# Altium PCB 110-00315-D_B1-DevKit.PcbDoc (part 7 of 9)
Units mil, origin at the board's own origin, x right, y up, seen from the top; angles counter-clockwise.
Board outline 5199.57 x 2702 mil, 8 copper layers (Top Layer, Layer 2-GND-Plane, Layer 3, Layer 4, Layer 5, Layer 6, Layer 7-PWR-Plane, Bottom Layer), stack 60.866 mil thick; 418 components, 298 nets, 1591 pads, 1631 vias.
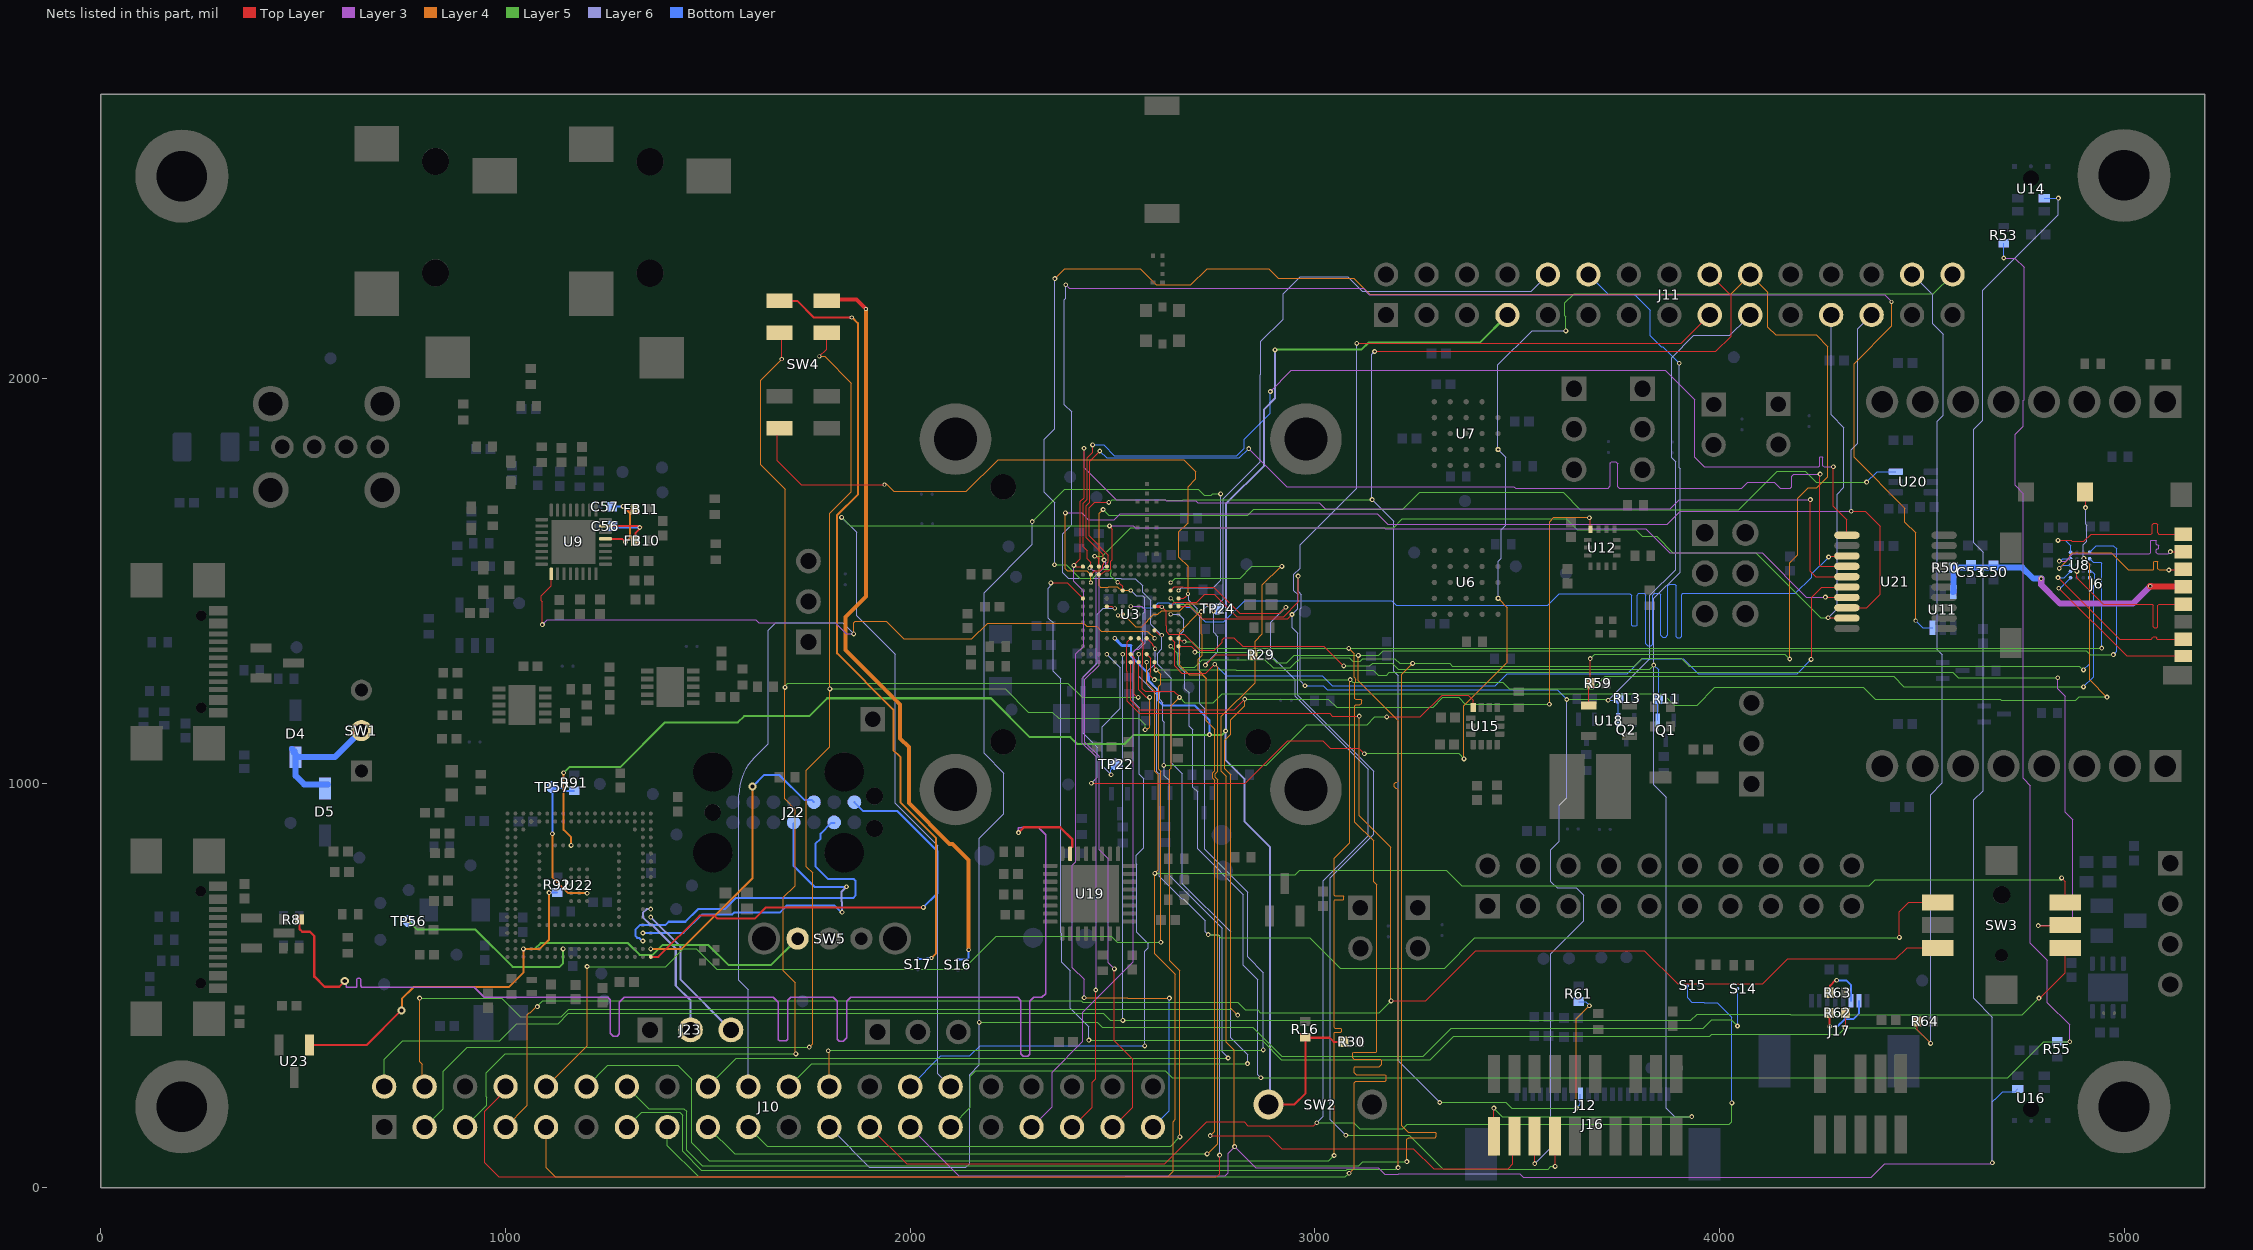
[diagram p12: the nets of this part, all layers, seen from the top]

## Via types
v1: diameter 20, hole 10, Top Layer to Bottom Layer, tented both sides, 773 vias
v2: diameter 12, hole 6, Top Layer to Bottom Layer, tented both sides, 549 vias
v3: diameter 12, hole 6, Top Layer to Bottom Layer, 194 vias
v4: diameter 10, hole 6, Top Layer to Bottom Layer, 101 vias
v5: diameter 10, hole 6, Top Layer to Bottom Layer, tented both sides, 10 vias
v6: diameter 15, hole 8, Top Layer to Bottom Layer, 4 vias

## Nets (pads, with @x,y where several pads share a name; then routed paths per layer and width w, separated by ;. In a path a pad name is that pad's centre, name@x,y a point inside that pad or via, vN(x,y) a via of type N, cw(c..) or ccw(c..) an arc to the next point about the centre after c; other vN are vias at no path point) (continued)
P4_4: J11.17 J12.14 U3.A6 | length 4005.2
  Top Layer w3: U3.A6@2663.06,1436.74 2690.59,1436.74 2721.53,1405.8 2932.53,1405.8 v2(2943.53,1416.8) ; v2(3103.58,2086.8) 3905.8,2086.8 3972.58,2153.58 J11.17@3972.58,2160.8 ; J12.14@3593,127.46 3593.58,126.88 v2@3593.58,53.8
  Layer 5 w3: v2(3076.58,129.8) 3233.58,129.8 3317.58,45.8 3576.58,45.8 3583.58,52.8 v2(3593.58,52.8)
  Layer 6 w3: v2(3076.58,129.8) 3038.53,167.84 3038.53,766.8 3145.53,873.8 3145.53,1028.8 2957.58,1216.75 2957.58,1370.3 2943.53,1384.35 v2(2943.53,1416.8) 2957.58,1430.84 2957.58,1466.31 2948.08,1475.81 2948.08,1516.15 2963.53,1531.6 2963.53,1588.75 3103.58,1728.8 v2(3103.58,2086.8)
P4_5: J11.19 J12.16 Q2.1 R13.2 U3.B6 | length 4057.4
  Top Layer w3: U3.B6@2643.37,1436.74 2653.12,1446.49 2692.23,1446.49 2692.53,1446.8 2707.58,1446.8 2727.58,1466.8 2751.58,1466.8 2806.58,1411.8 2922.53,1411.8 2958.58,1447.84 v2(2958.58,1511.8) ; J12.16@3543,127.46 3543.58,126.88 v2(3543.58,59.8) 3543.58,56.8 v2@3544.58,55.8
  Layer 5 w3: v2(3622.58,1206.8) 3722.58,1206.8 v2(3724.58,1204.8)
  Layer 6 w3: v2(2958.58,1511.8) 2958.58,1473.8 2966.58,1465.8 2966.58,1433.8 2963.58,1430.8 2963.58,1252.8 v2(2975.58,1240.8) ; v2(3543.58,59.8) 3582.58,98.8 3582.58,577.8 3664.58,659.8 3664.58,722.8 3645.58,741.8 3598.58,741.8 3583.58,756.8 3583.58,835.8 3603.58,855.8 3603.58,944.8 3622.58,963.8 v2(3622.58,1206.8) ; v2(3724.58,1204.8) 3725.25,1204.8 3827.53,1307.08 3827.53,1463.8 3891.53,1527.8 3891.53,1794.3 3881.53,1804.3 3881.53,2051.66 3936.67,2106.8 4025.8,2106.8 4066.8,2147.8 J11.19@4076.58,2147.8
  Bottom Layer w3: v2(2975.58,1240.8) 3020.58,1240.8 3030.58,1230.8 3598.58,1230.8 v2(3622.58,1206.8) ; v2(3724.58,1204.8) 3747.11,1204.8 R13.2@3750,1207.69 ; Q2.1@3750,1156 R13.2@3750,1207.69 ; R13.2@3752.32,1210 R13.2@3750,1207.69
P4_6: J11.10 J12.18 U3.B5 | length 4076.5
  Top Layer w3: v2(2741.58,128.8) 2885.58,128.8 2917.58,96.8 3243.58,96.8 3293.58,46.8 3477.58,46.8 3489.58,58.8 3489.58,99.8 J12.18@3497.58,107.8
  Layer 5 w3: v4(2643.37,1456.43) 2658,1441.8 2688.58,1441.8 2707.58,1422.8 2718.58,1422.8 v2(2719.58,1423.8)
  Layer 4 w3: v2@2719.53,1421.8 2719.25,1422.07 2715.42,1422.07 2715.14,1421.8 2714.53,1421.8 2665.53,1372.8 2665.53,1291.8 2689.53,1267.8 2721.58,1267.8 2731.58,1257.8 ; v2@2719.58,1421.8 2719.58,1369.58 2721.58,1367.58 2721.58,1315.8 2711.58,1305.8 2711.58,1279.8 2731.58,1259.8 2731.58,1257.8 ; v2(2741.58,128.8) 2752.58,139.8 2752.58,1007.46 2748.08,1011.96 2748.08,1025.63 2752.58,1030.13 2752.58,1132.8 2731.58,1153.8 2731.58,1251.8 2731.58,1257.8
  Layer 6 w3: v2(2719.58,1423.8) 2732.98,1437.2 2755.98,1437.2 2773,1454.22 2773,1702.22 2865.58,1794.8 2865.58,2008.8 ; 2866.58,2008.8 2866.58,2091.8 2921.53,2146.75 2921.53,2209.8 2963.53,2251.8 3081.53,2251.8 3117.53,2215.8 3534.8,2215.8 3574.53,2255.53 J11.10@3574.53,2257.8 ; J11.10@3574.87,2258.14 J11.10@3575.58,2257.43
P4_7: J11.12 J12.20 Q1.1 R11.2 U3.D6 | length 4394.3
  Top Layer w3: v4@2622.53,1436.8 2622.53,1434.84 2633.08,1424.3 2633.08,1388.8 ; 2633.53,1388.8 2633.53,1373.74 2639.34,1367.94 2639.53,1367.75 2676.62,1367.75 2715.58,1328.8 2751.58,1328.8 2770.58,1347.8 2770.58,1353.8 2776.58,1359.8 2799.53,1359.8 2821.53,1337.8 3022.58,1337.8 v2@3071.58,1288.8 ; v2@3442.58,194.8 3442.58,127.88 J12.20@3443,127.46
  Top Layer w8: U3.D6@2604,1436.74 v4@2620.63,1436.74
  Layer 5 w3: v2(3071.58,1289.8) 3135.58,1289.8 3142.58,1296.8 3165.58,1296.8 3166.58,1295.8 3191.58,1295.8 3205.58,1281.8 3827.58,1281.8 v2(3837.58,1291.8) ; v2(3442.58,196.8) 3463.58,175.8 v2(3931.58,175.8)
  Layer 4 w3: J11.12@3664.58,2255.8 J11.12@3677.21,2255.8
  Layer 6 w3: v2(3900.53,2037.8) 3900.53,1779.6 3902.58,1777.56 3902.58,1521.8 3837.58,1456.8 v2(3837.58,1291.8) 3837.58,996.08 3868.58,965.08 3868.58,196.8 3889.58,175.8 v2(3931.58,175.8)
  Bottom Layer w3: J11.12@3670.53,2254.8 3678.21,2254.8 3725.21,2207.8 3789.53,2207.8 3828.53,2168.8 3828.53,2105.8 3856.24,2078.08 3860.24,2078.08 v2(3900.53,2037.8) ; v2@3837.58,1292.8 v2(3837.58,1291.8) 3849.32,1280.06 R11.2@3849.32,1208 ; R11.2@3845.58,1205.8 3847.32,1204.06 Q1.1@3847.32,1155.58
  other v4: 2621.58,1435.8
P5_0: J10.2 SW3.1 U3.H12 | length 5280.7
  Top Layer w3: v2@4787.58,464.8 4854.48,531.7 SW3.1@4854.48,593.1
  Layer 5 w3: J10.2@693.58,267.8 700,274.22 700,318.22 745.58,363.8 985.58,363.8 1027.58,405.8 1129.58,405.8 1154.58,430.8 2477.58,430.8 2494.58,413.8 v2(2525.58,413.8) 3929.58,413.8 3944.58,428.8 4174.91,428.8 4175.71,428.01 4748.79,428.01 v2(4789.58,468.8)
  Layer 6 w3: v4(2525.26,1318.63) 2525.58,1318.32 v2(2525.58,413.8)
P5_1: J10.4 U3.G13 U12.4 | length 4842.6
  Top Layer w3: U3.G13@2544.95,1298.95 2544.95,1204.43 2567.58,1181.8 2800.58,1181.8 v2(2826.58,1207.8) ; v2@3676.58,1656.8 3676.58,1655.36 3681.05,1650.89 U12.4@3681.05,1627.56
  Layer 5 w3: v2(787.58,468.8) 990.58,468.8 1036.58,422.8 1137.58,422.8 1155.58,440.8 2794.73,440.8 2808.73,426.8 v2(2809.58,426.8) ; v2(2826.58,1207.8) 3033.58,1207.8 3053.58,1187.8 3292.58,1187.8 3316.58,1211.8 3355.09,1211.8 3372.09,1194.8 v2(3579.58,1194.8)
  Layer 4 w3: v2(787.58,468.8) 787.58,311.8 794.58,304.8 794.58,262.8 J10.4@797.58,259.8 ; v2(2809.58,426.8) 2792.58,443.8 2792.58,1020.8 2777.58,1035.8 2777.58,1105.8 2792.58,1120.8 2792.58,1156.8 2826.58,1190.8 v2(2826.58,1207.8) ; v2(3579.58,1194.8) 3580.08,1195.3 3580.08,1646.3 3590.58,1656.8 3677.58,1656.8 v2(3678.58,1655.8)
P5_2: J10.3 SW4.6 U3.F13 | length 3977.7
  Top Layer w3: v4(1775.58,2054.84) 1793.53,2072.8 SW4.6@1793.53,2103.8 ; U3.F13@2564.63,1298.95 2564.63,1230.74 2583.58,1211.8 v2(2591.58,1211.8)
  Layer 5 w3: J10.3@799.58,136.8 799.58,149.58 J10.3@800,150 845.53,195.53 845.53,287.75 905.58,347.8 v2(1750.58,347.8) ; v2(1801.53,1232.8) 2234.53,1232.8 2291.53,1175.8 2351.58,1175.8 2367.58,1159.8 2564.61,1159.8 2580.53,1143.88 v2(2580.53,1131.8)
  Layer 4 w3: v2(1750.58,347.8) 1758.53,355.75 1758.53,778.8 1743.53,793.8 1743.53,1031.8 1765.53,1053.8 ; 1765.56,1053.77 1801.53,1089.75 v2(1801.53,1232.8) 1801.53,1666.75 1854.58,1719.8 1854.58,1988.8 1788.58,2054.8 v4(1775.58,2054.84) ; v2(2580.53,1131.8) 2582.97,1131.8 2586.81,1135.64 2589.5,1135.64 2591.58,1137.72 v2(2591.58,1211.8)
P5_3: J10.5 SW4.2 U3.G12 | length 3801.4
  Top Layer w3: SW4.2@1681.53,2108.8 1682.53,2107.8 v4(1682.53,2047.8) ; U3.G12@2544.95,1318.63 2553.53,1310.05 2553.53,1304.15 2554.7,1302.99 2554.7,1294.91 2553.53,1293.74 2553.53,1219.84 v2@2561.58,1211.8
  Layer 5 w3: J10.5@905.58,157.8 907.8,157.8 953.58,203.58 953.58,223.8 952.58,224.8 952.58,284.8 998.58,330.8 v2(1717.58,330.8) ; v2(1690.53,1236.8) 1690.53,1239.23 1695.4,1244.11 1695.4,1244.65 1697.55,1246.8 2389.58,1246.8 2424.58,1211.8 v2(2563.58,1211.8)
  Layer 4 w3: v4@1682.58,2047.8 1630.58,1995.8 1630.58,1786.8 1690.58,1726.8 1690.58,1237.84 v2@1690.03,1237.3 ; v2(1690.53,1236.8) 1689.53,1235.8 1689.53,960.84 1715.58,934.8 1715.58,746.8 ; 1715.53,746.8 1686.53,717.8 1686.53,535.84 1715.58,506.8 1715.58,332.8 v2(1717.58,330.8)
P5_4: J10.7 SW3.4 U3.G10 | length 5414
  Top Layer w3: 2535.53,1276.8 2535.2,1277.13 2535.2,1337.05 2535.95,1337.8 2535.95,1349 U3.G10@2544.95,1358 ; 2535.95,1276.8 2535.95,1202.43 2565.58,1172.8 3036.58,1172.8 3043.58,1165.8 v2(3109.58,1165.8) ; v2(3188.53,461.8) 3273.53,461.8 3397.53,585.8 3447.53,585.8 3814.58,585.8 3896.58,503.8 4106.58,503.8 4168.58,565.8 4435.58,565.8 4463.58,593.8 SW3.4@4520.58,593.8
  Layer 5 w3: v2(1078.53,447.8) 1078.53,448.8 1091.53,461.8 2422.73,461.8 2426.23,458.3 2644.93,458.3 2645.43,458.8 2809.48,458.8 2828.48,439.8 2858.48,439.8 2865.48,432.8 3159.53,432.8 v2(3188.53,461.8)
  Layer 4 w3: J10.7@1000,150 1053.58,203.58 1053.58,427.95 1058.64,433.01 1061.47,433.01 1076.25,447.8 v2(1078.53,447.8) ; v2(3109.58,1165.8) 3109.58,919.31 3187.53,841.36 3187.53,462.8 v2(3188.53,461.8)
P5_5: J10.9 SW3.3 U3.E13 | length 5297.9
  Top Layer w3: v2(4845.58,765.8) 4854.48,756.89 SW3.3@4854.48,705.3
  Layer 5 w3: v2(2604.58,776.8) 2778.05,776.8 2781.05,773.8 2952.09,773.8 2963.09,784.8 3324.53,784.8 3362.53,746.8 4369.58,746.8 4384.58,761.8 4844.58,761.8 v2@4845.58,762.8
  Layer 4 w3: J10.9@1100,150 1100,49.37 1122.58,26.8 2530.58,26.8 2532.58,28.8 2637.58,28.8 2649.58,40.8 2649.58,163.8 2655.58,169.8 2655.58,527.8 2604.58,578.8 v2(2604.58,776.8) v2@2604.58,777.8 ; v4(2584.32,1298.95) 2584.32,1246.91 2604.58,1226.65 2604.58,1029.75 2613.53,1020.8 2613.53,785.75 2605.58,777.8 v2@2604.58,777.8 ; v2@2603.53,777.8 v2@2604.58,777.8
P5_6: J10.8 SW3.6 U3.F12 | length 5381
  Top Layer w3: J10.8@990.58,265.8 990.58,230.8 948.58,188.8 948.58,61.8 983.58,26.8 2756.58,26.8 2764.58,34.8 v2(2764.58,80.8) ; v2@4442.58,619.8 4444.58,621.8 4444.58,681.8 4468.08,705.3 SW3.6@4539.52,705.3
  Layer 5 w3: v2(2736.53,625.8) 2759.58,625.8 2767.58,617.8 2987.53,617.8 3062.53,542.8 3320.53,542.8 3395.53,617.8 4443.58,617.8 v2(4444.58,618.8)
  Layer 6 w3: v4(2564.63,1318.63) 2564.63,1263.74 2609.58,1218.8 2609.58,1028.31 2615.08,1022.81 2615.08,770.3 2670.72,714.66 2674.72,714.66 2729.14,660.24 2729.14,633.25 2736.53,625.86 v2(2736.53,625.8) 2762.82,625.8 2764.58,624.04 v2(2764.58,80.8)
P5_7: J10.10 SW3.2 U3.D13 | length 5552.9
  Top Layer w3: U3.D13@2604,1298.95 2604,1285.81 2607.58,1282.23 v2(2607.58,1279.8) ; v2(4787.58,647.8) 4853.08,647.8 SW3.2@4854.48,649.2
  Layer 3 w3: v2(4787.58,647.8) 4788.98,649.2 4854.48,649.2 4873.58,668.29 4873.58,909.3 4854.58,928.3 4854.58,1214.8 4836.08,1233.3 v2(4836.08,1260.3)
  Layer 5 w3: v2(1201.58,546.8) 1395.53,546.8 1439.03,590.3 1471.03,590.3 1521.53,539.8 2130.53,539.8 2212.53,621.8 2496.53,621.8 2511.53,606.8 v2(2619.58,606.8) ; v2(2607.58,1279.8) 2804.58,1279.8 2805.58,1278.8 3144.07,1278.8 3156.07,1266.8 3177.09,1266.8 3184.09,1273.8 4576.83,1273.8 4590.33,1260.3 v2(4836.08,1260.3) v2@4836.58,1260.8
  Layer 4 w3: J10.10@1100,250 1201.58,351.58 v2(1201.58,546.8) ; v2@2607.58,1277.36 v2(2607.58,1279.8) 2618.58,1268.8 2618.58,1243.8 2614.58,1239.8 2614.58,1034.75 2619.58,1029.75 v2(2619.58,606.8)
P6_0: J10.12 U3.E12 U8.D1 | length 6042.4
  Top Layer w3: U3.E12@2584.53,1318.8 2584.53,1318.42 2594.07,1308.88 2594.07,1275.29 2593.58,1274.8 2593.58,1265.8 2602.58,1256.8 v2@2602.58,1254.8
  Layer 5 w3: J10.12@1200,250 1252.8,302.8 1425.58,302.8 1459.58,268.8 1459.58,110.8 1503.58,66.8 3034.58,66.8 v2(3047.58,79.8) ; v2(2603.58,1255.8) v2(3087.58,1255.8) 3087.84,1255.8 3093.84,1249.8 3464.58,1249.8 3480.58,1233.8 3687.58,1233.8 3717.58,1263.8 4430.58,1263.8 4455.58,1238.8 v2@4900.58,1238.8
  Layer 4 w3: v2(3047.58,79.8) 3047.58,382.8 3049.58,384.8 3064.53,384.8 ; 3064.53,394.8 3049.58,394.8 3047.58,396.8 3047.58,709.8 3049.58,711.8 3069.58,711.8 ; 3064.58,384.8 3066.58,386.8 3066.58,392.8 3064.58,394.8 ; 3069.58,721.8 3048.58,721.8 3047.58,722.8 3047.58,813.8 3086.58,852.8 3086.58,1254.8 v2(3087.58,1255.8) ; 3069.82,711.8 3071.58,713.55 3071.58,720.04 3069.82,721.8
  Bottom Layer w3: v2@4898.58,1236.8 v2(4899.58,1237.8) 4924.58,1262.8 4924.58,1488.8 4927.58,1491.8 4927.58,1515.8 4921.27,1522.11 4915.9,1522.11 U8.D1@4914.75,1523.25
P6_1: J10.14 U3.B11 U8.E1 | length 6043
  Layer 5 w3: J10.14@1300,250 1354.21,195.8 1440.58,195.8 1447.58,188.8 1447.58,92.8 1485.58,54.8 3108.58,54.8 3118.58,64.8 v2(3227.58,64.8) ; v4(2643.37,1338.32) 2661.58,1320.11 2661.58,1292.8 2668.58,1285.8 2702.58,1285.8 2721.58,1304.8 2876.58,1304.8 2896.58,1284.8 2938.58,1284.8 2955.58,1301.8 2957.58,1301.8 2965.58,1309.8 3085.58,1309.8 3093.58,1301.8 3112.58,1301.8 3118.58,1307.8 3197.58,1307.8 3209.58,1295.8 v2(3241.58,1295.8) 3333.07,1295.8 3339.57,1289.3 3789.58,1289.3 3809.08,1308.8 3905.58,1308.8 3924.58,1289.8 ; 3924.58,1289.3 4889.08,1289.3 v2@4899.58,1278.8
  Layer 4 w3: v2(3227.58,64.8) 3227.58,119.8 3231.58,123.8 3297.58,123.8 3300.58,126.8 3300.58,134.8 3297.58,137.8 3230.58,137.8 3214.53,153.84 3214.53,1268.75 v2(3241.58,1295.8)
  Bottom Layer w3: v2(4899.58,1279.8) 4914.75,1294.97 U8.E1@4914.75,1507.51
P6_2: J10.13 U3.A11 U8.A1 | length 6041.5
  Top Layer w3: U3.A11@2663.06,1338.32 2695.06,1338.32 2703.58,1329.8 v2(2703.58,1323.8)
  Layer 5 w3: J10.13@1300,150 1336.8,186.8 1430.58,186.8 1437.58,179.8 1437.58,89.8 1483.58,43.8 3077.73,43.8 3080.23,46.3 3199.64,46.3 3203.14,49.8 v2(3205.58,49.8) ; v2(2703.58,1323.8) 2879.58,1323.8 2905.58,1297.8 2930.58,1297.8 2948.58,1315.8 v2(3107.58,1315.8) 3157.83,1315.8 3169.33,1327.3 4906.08,1327.3 4916.58,1316.8 v2@4973.58,1316.8
  Layer 4 w3: v2(3107.58,1315.8) 3107.58,1252.8 3205.58,1154.8 3205.58,1005.8 ; 3205.53,1005.8 3205.53,1004.8 3202.53,1001.8 3199.53,1001.8 3196.53,998.8 3196.53,990.8 3199.53,987.8 3202.58,987.8 3205.58,984.8 v2(3205.58,49.8)
  Bottom Layer w3: U8.A1@4914.75,1570.5 4931.05,1586.8 4973.58,1586.8 4981.58,1578.8 4981.58,1325.8 v2(4973.58,1317.8)
P6_3: J10.15 U3.A10 U8.B1 | length 6001.5
  Top Layer w3: U3.A10@2663.06,1358 2669.68,1351.38 2675.86,1351.38 v5(2677.58,1349.66)
  Layer 5 w3: J10.15@1400,150 1400,104.37 1477.58,26.8 3075.58,26.8 v2(3084.58,35.8) ; v5(2677.58,1349.66) 2696.72,1349.66 2712.58,1333.8 v2@3083.58,1333.8 ; v2@3084.08,1333.3 4944.08,1333.3 v2(4944.58,1333.8) ; 3158.58,1333.8 3159.08,1333.3
  Layer 4 w3: v2@3083.58,1332.8 3097.08,1319.3 3097.08,1261.15 3101.58,1256.65 3101.58,1250.8 ; v2(3084.58,35.8) 3097.08,48.3 3097.08,259.8 3101.08,263.8 3174.58,263.8 3176.58,265.8 3176.58,277.8 3174.58,279.8 3102.58,279.8 3097.58,284.8 ; 3095.08,334.8 3093.08,332.8 3093.08,321.25 3096.53,317.8 3161.58,317.8 3165.58,313.8 3165.58,304.8 3159.58,298.8 3099.08,298.8 3097.08,296.8 3097.08,284.8 ; 3095.53,334.8 3150.58,334.8 3152.58,336.8 3152.58,748.95 3145.08,756.45 3145.08,857.81 3099.08,903.81 3099.08,1191.8 3101.08,1193.8 3111.53,1193.8 3115.53,1197.8 3115.53,1204.8 3113.53,1206.8 3101.53,1206.8 3099.53,1208.8 ; 3099.08,1208.8 3099.08,1248.34 3101.53,1250.8
  Bottom Layer w3: U8.B1@4914.75,1554.75 4923.71,1545.8 4942.82,1545.8 4944.58,1544.04 v2(4944.58,1333.8)
  other v2: 3083.75,1333.02
P6_4: J10.17 U3.B10 U21.6 | length 4501.1
  Top Layer w3: U3.B10@2643.37,1358 2653.58,1347.8 2653.58,1341.07 2653.31,1340.8 2653.31,1290.02 2671.53,1271.8 2730.58,1271.8 v2(2752.58,1293.8) ; v2@4226.58,1308.8 4227.58,1309.8 4227.58,1459.8 4252.45,1484.66 4304.45,1484.66 4306.58,1486.8 4308.71,1484.66 U21.6@4314.85,1484.66
  Layer 5 w3: J10.17@1486.58,158.8 1491.21,158.8 J10.17@1500,150 1566.21,83.8 v2(2733.58,83.8)
  Layer 4 w3: v2@2734.58,82.8 2760.58,108.8 2760.58,1007.95 2754.08,1014.45 2754.08,1023.15 2760.58,1029.65 2760.58,1285.8 v2(2752.58,1293.8)
  Bottom Layer w3: v2(2752.58,1293.8) 2780.58,1265.8 3018.58,1265.8 3043.58,1240.8 3445.58,1240.8 3475.58,1270.8 3772.58,1270.8 3809.58,1307.8 3910.58,1307.8 3947.58,1270.8 4191.58,1270.8 v2(4226.58,1305.8)
P6_5: J6.9 J10.19 U3.F10 U8.B2 | length 5325.9
  Top Layer w3: U3.F10@2564.63,1358 2575.58,1347.06 2575.58,1329.8 2574.38,1328.6 2574.38,1294.91 2573.53,1294.06 2573.53,1274.8 ; 2573.82,1274.8 2573.82,1233.56 2580.58,1226.8 2621.58,1226.8 2622.08,1227.3 2651.82,1227.3 2665.58,1213.54 v2(2665.58,1211.8) ; J6.9@4903.44,1719.24 4904.58,1718.1 v2(4904.58,1680.8)
  Layer 5 w3: J10.19@1600,150 1647.21,102.8 2643.58,102.8 v2(2666.58,125.8) ; v2(2665.58,1211.8) 2678.58,1198.8 2748.58,1198.8 2770.58,1220.8 3859.58,1220.8 3887.58,1192.8 3944.58,1192.8 3988.58,1236.8 4355.58,1236.8 4384.58,1207.8 4693.84,1207.8 4696.34,1205.3 4880.93,1205.3 4889.43,1213.8 v2@4960.58,1213.8
  Layer 4 w3: v2(2665.58,1211.8) 2645.15,1191.37 2645.15,1037.37 2641.58,1033.8 2641.58,560.8 2666.58,535.8 v2(2666.58,125.8) ; v2(4900.58,1555.8) 4914.96,1541.42 4914.96,1255.42 v2(4957.58,1212.8)
  Layer 6 w3: v2(4900.58,1555.8) 4899,1557.37 4899,1589.22 4907.65,1597.86 4907.65,1636.58 4904.58,1639.65 v2(4904.58,1680.8)
P6_6: J10.18 U3.E10 U15.4 | length 3311.5
  Top Layer w3: U3.E10@2584.32,1358 2599.23,1343.1 2599.23,1340.47 2605.18,1334.52 v4(2605.18,1332.08) ; v2(3177.58,1163.8) 3260.58,1163.8 3314.58,1217.8 3378.58,1217.8 3391.48,1204.9 U15.4@3391.48,1186.87
  Layer 5 w3: J10.18@1500,250 1570.3,320.3 2785.08,320.3 v2(2785.58,320.8) ; v2@2626.05,1043.8 v2(2626.58,1043.8) 2879.58,1043.8 2980.58,1144.8 3129.58,1144.8 3148.58,1163.8 v2(3177.58,1163.8)
  Layer 6 w3: v4@2605.18,1331.8 v4(2605.18,1332.08) ; v4@2606.58,1331.8 2605.18,1330.4 2605.18,1295.4 2587.58,1277.8 2587.58,1252.8 2616.08,1224.3 2616.08,1206.79 2624.08,1198.79 2624.08,1153.95 2627.58,1150.45 2627.58,1018.8 2639.58,1006.8 2639.58,771.8 2770.58,640.8 2770.58,335.8 v2(2785.58,320.8)
P6_7: J10.20 U3.D10 U9.1 | length 3140.2
  Top Layer w3: v2(1090.92,1391.8) 1090.92,1448.36 1088.38,1450.9 1088.38,1463 1112.73,1487.35 1112.73,1517.11 U9.1@1112.89,1517.26
  Layer 3 w3: v2(1090.92,1391.8) 1102.92,1403.8 1617.86,1403.8 1625.86,1395.8 1814.58,1395.8 1841.58,1368.8 v2(1860.58,1368.8)
  Layer 4 w3: v2(1860.58,1368.8) 1860.58,1395.8 1864.58,1399.8 1940.58,1399.8 1983.58,1356.8 2152.53,1356.8 2191.03,1395.3 2428.91,1395.3 2436.34,1387.87 2460.5,1387.87 2472.58,1375.8 2586.21,1375.8 v4(2604,1358)
  Layer 6 w3: 1576.53,970.86 1576.53,512.44 1599.82,489.15 J10.20@1599.82,249.55 ; 1576.53,970.88 cw(c1706.7,970.88) 1614.67,1062.93 1649.53,1097.8 1649.53,1377.8 1667.53,1395.8 1833.58,1395.8 v2(1860.58,1368.8) v2@1861.53,1368.8
P7_0: J10.22 U3.D9 U11.3 | length 6419
  Top Layer w3: U3.D9@2604,1377.69 2614.17,1367.52 2619.86,1367.52 v4(2621.58,1365.8)
  Layer 3 w3: v2(2384.53,2231.8) 2393.53,2222.8 3119,2222.8 3135,2206.8 4408.53,2206.8 v4@4425.53,2189.8
  Layer 5 w3: J10.22@1696.58,248.8 1698.8,248.8 J10.22@1700,250 1756.8,306.8 v2(2833.58,306.8)
  Layer 4 w3: v4@4425.53,2189.8 4425.53,2129.8 4332.53,2036.8 4332.53,1804.8 4458,1679.32 4458,1645.32 4484.53,1618.8 v4(4484.53,1401.8)
  Layer 6 w3: v2(2384.53,2231.8) 2384.53,2198.05 2381.08,2194.6 2381.08,1935.72 2398.9,1917.9 2398.9,1638.14 2376.53,1615.77 2376.53,1519.74 2390.29,1505.98 2520.7,1505.98 2521.01,1505.67 2556.66,1505.67 2574.82,1487.51 2574.82,1472.18 2594.53,1452.46 2594.53,1392.84 v4(2621.58,1365.8) 2621.58,1331.8 2611.18,1321.4 2611.18,1294.19 2645.58,1259.8 2645.58,1049.8 2672.58,1022.8 2672.58,751.8 2791.58,632.8 2791.58,370.8 2833.58,328.8 v2(2833.58,306.8)
  Bottom Layer w3: v4(4484.53,1401.8) 4502.58,1383.75 U11.3@4526.41,1383.75
  other v4: 4425.1,2189.54
P7_1: J10.24 SW4.4 U3.A5 | length 3931.1
  Top Layer w3: SW4.4@1671.53,1882.8 1671.53,1796.8 1730.53,1737.8 v4(1936.53,1737.8) ; U3.A5@2663.06,1456.43 2675.58,1456.43 2678.11,1458.96 2679.76,1458.96 2681,1460.19 2686.58,1465.81 v5(2686.58,1467.7)
  Layer 5 w3: v2(1797.58,338.8) 1798.58,339.8 2871.53,339.8 v2(2872.53,340.8)
  Layer 4 w3: v2@1797.58,343.8 1800,341.37 J10.24@1800,250 ; v4(1936.53,1737.8) 1938.43,1737.8 1940.18,1739.55 1940.77,1739.55 1959.53,1720.8 2138.53,1720.8 2217.53,1799.8 2675.53,1799.8 2705.53,1769.8 2705.53,1751.73 2686.58,1732.78 2686.58,1644 ; v5(2686.58,1467.7) 2686.58,1535.42 2664,1558 2664,1621 2687,1644
  Layer 6 w3: v5(2686.58,1467.7) 2687.92,1466.36 2687.92,1452.46 2709.41,1430.96 2709.41,1428.48 2709.08,1428.15 2709.08,1419.45 2715.58,1412.95 2715.58,1196.3 2727.53,1184.34 2727.53,836.84 2833.58,730.8 2833.58,570.8 2872.58,531.8 2872.58,340.84 v2(2872.53,340.8)
P7_2: J10.23 S14.2 U3.A4 | length 4962.5
  Layer 5 w3: v2(2170.58,408.8) 2462.58,408.8 2474.58,396.8 2846.02,396.8 2918.02,324.8 3267.69,324.8 3337.53,394.64 3960.42,394.64 3980.58,414.8 4029.58,414.8 v2(4044.58,399.8) ; v2(2301.53,1646.3) 2382.03,1726.8 2711.58,1726.8 2726.58,1711.8 2743.97,1711.8 2747.17,1715 v2(2767,1715)
  Layer 6 w3: J10.23@1795.58,140.8 1809.21,140.8 1899.21,50.8 2137.58,50.8 2146.58,59.8 2146.58,279.8 2170.58,303.8 v2(2170.58,408.8) 2170.58,863.8 2231.58,924.8 2231.58,1024.8 2182.58,1073.8 2182.58,1470.95 2301.53,1589.9 v2(2301.53,1646.3) ; v4(2663.06,1476.11) 2669.74,1482.8 2748.82,1482.8 2767,1500.98 v2(2767,1715)
  Bottom Layer w3: v2(4044.58,399.8) 4044.93,400.15 S14.2@4044.93,492
P7_3: J10.25 S15.2 U3.B4 | length 4412.8
  Top Layer w3: J10.25@1900,150 1991.21,58.8 2628.58,58.8 2732.58,162.8 2825.58,162.8 2834.58,153.8 2996.73,153.8 3003.73,160.8 v2(3004.58,160.8) ; U3.B4@2643.37,1476.11 2653.12,1485.86 2673.47,1485.86 2674.53,1484.8 ; 2675.58,1483.8 2750.58,1483.8 2814.58,1419.8 2913.53,1419.8 v2(2928.53,1434.8)
  Layer 5 w3: v2(3004.58,160.8) 3095.58,160.8 3110.58,145.8 3217.58,145.8 3228.58,156.8 4024.58,156.8 4030.58,162.8 v2(4030.58,209.8)
  Layer 6 w3: 2891.53,1315.8 2951.58,1255.75 2951.58,1214.26 3131.53,1034.31 3131.53,869.75 3020.58,758.8 3020.58,176.8 v2(3004.58,160.8) ; 2891.58,1315.8 2891.58,1397.84 v2(2928.53,1434.8)
  Bottom Layer w3: S15.2@3921.03,500 3921.03,469.34 3931.58,458.8 3961.58,458.8 3962.58,457.8 3994.58,457.8 4030.58,421.8 v2(4030.58,209.8)
P7_4: J10.27 U3.B3 U14.6 U16.6 | length 7404.3
  Layer 3 w3: J10.27@1998.58,151.8 1998.58,151.43 J10.27@2000,150 2120.21,29.8 2778.58,29.8 2785.58,36.8 2785.58,85.8 v2(2801.58,101.8) 2853.58,49.8 3156.58,49.8 3172.58,33.8 3206.58,33.8 3207.58,34.8 3506.58,34.8 3515.58,25.8 4375.58,25.8 4408.58,58.8 4671.58,58.8 v2(4674.58,61.8)
  Layer 5 w3: v4(2643.37,1495.8) 2654.37,1506.8 2815.2,1506.8 2844.2,1535.8 v2(2918.53,1535.8)
  Layer 4 w3: v2(2801.58,101.8) 2800.58,102.8 2800.58,339.8 2780.58,359.8 2780.58,1017.65 2769.08,1029.15 2769.08,1165.15 2852.58,1248.65 2852.58,1350.8 2870.58,1368.8 2870.58,1489.8 2916.58,1535.8 v2(2918.53,1535.8)
  Layer 6 w3: v2(4674.58,61.8) 4674.58,421.8 4628.58,467.8 4628.58,958.8 4651.58,981.8 4651.58,1570.8 4628.58,1593.8 4628.58,1874.8 4650.58,1896.8 4650.58,2217.8 4837.58,2404.8 v2(4837.58,2445.8)
  Bottom Layer w3: v2@4675.58,62.8 4674.58,63.8 4674.58,212.8 4680.58,218.8 4681.58,218.8 4700.58,237.8 4730.52,237.8 U16.6@4737.01,244.29 ; U14.6@4803,2445.71 4803.08,2445.8 4836.58,2445.8 v2@4837.58,2446.8
P7_5: J10.29 R53.2 R55.2 U3.B7 | length 6280.6
  Layer 3 w3: v2(4702.53,2297.8) 4729.53,2297.8 4752.58,2274.75 4752.58,1947.8 4750.58,1945.8 4750.58,1881.8 4730.58,1861.8 4730.58,1735.8 4750.58,1715.8 4750.58,1011.8 4768.58,993.8 4768.58,604.8 4810.58,562.8 4810.58,457.8 4865.58,402.8 v2(4865.58,360.8)
  Layer 5 w3: J10.29@2095.58,154.8 2104.8,154.8 2148.58,198.58 2148.58,275.8 2161.58,288.8 2630.58,288.8 2647.58,271.8 v2(2866.58,271.8) 4712.58,271.8 4801.58,360.8 v2(4865.58,360.8)
  Layer 6 w3: v4(2643.37,1417.06) 2663.32,1417.06 2675.58,1404.8 2675.58,1376.8 2664.58,1365.8 2664.58,1287.8 2678.58,1273.8 2678.58,1233.8 2689.58,1222.8 2689.58,1140.8 2698.53,1131.84 2698.53,990.34 2710.03,978.84 2710.03,837.34 2822.58,724.8 2822.58,549.8 2858.58,513.8 2858.58,279.8 v2(2866.58,271.8)
  Bottom Layer w3: v2(4702.53,2297.8) R53.2@4702.53,2333.8 ; R55.2@4835,362 4836.21,360.8 4864.58,360.8 v2@4866.58,362.8
P7_6: J10.28 U3.G4 U20.3 | length 4165.9
  Layer 5 w3: v2(2476.8,1676.2) 2490.9,1662.1 2833.88,1662.1 2848.58,1676.8 3217.53,1676.8 3259.53,1718.8 3613.53,1718.8 3656.36,1675.97 4047.71,1675.97 4142.53,1770.8 4211.58,1770.8 4238.58,1743.8 v2(4363.58,1743.8)
  Layer 4 w3: v2(2476.8,1676.2) 2466.98,1666.38 2466.98,1487.35 2470.03,1484.3 2489.12,1484.3 2490.43,1485.61 2511.99,1485.61 2521.49,1476.11 v4(2544.95,1476.11)
  Layer 6 w3: v4(2544.95,1476.11) 2558.26,1462.8 2574.58,1462.8 2579.58,1457.8 2579.58,1423.8 2575.58,1419.8 2575.58,1377.8 2574.58,1376.8 2574.58,1346.8 2551.58,1323.8 2551.58,1200.8 2566.58,1185.8 2566.58,1021.8 2577.58,1010.8 2577.58,840.8 2558.58,821.8 2558.58,800.8 2559.58,799.8 2559.58,631.8 2588.58,602.8 2588.58,593.8 2579.58,584.8 v2(2579.58,350.8)
  Bottom Layer w3: J10.28@1996.58,250.8 2000.8,250.8 2075.8,325.8 2147.58,325.8 2172.58,350.8 v2(2579.58,350.8) ; v2@4363,1742 4363,1743.22 4389.63,1769.84 U20.3@4435.7,1769.84
P7_7: J10.30 U3.L2 U21.7 | length 4232.5
  Top Layer w3: U3.L2@2466.21,1515.48 2467.64,1516.92 2473.54,1516.92 2482.04,1525.42 2491.15,1525.42 2495.53,1529.8 ; v2(2492.58,1635.8) 2492.58,1634.95 2499.58,1627.95 2499.58,1552.36 2495.83,1548.61 2495.83,1529.8 ; v2@4262.58,1460.8 4263.94,1459.43 4314.48,1459.43 U21.7@4314.85,1459.07
  Layer 3 w3: v2(2492.58,1635.8) 2551.33,1635.8 2555.65,1631.48 3170.9,1631.48 3173.58,1628.8 3817.58,1628.8 3877.58,1568.8 4105.58,1568.8 4214.58,1459.8 v2(4261.58,1459.8)
  Layer 5 w3: v2(1830.58,1656.8) 1851.58,1635.8 v2(2492.58,1635.8)
  Layer 6 w3: v2@1828.58,1658.8 1867.58,1619.8 1867.58,1422.8 ; 1867.53,1422.8 1867.53,1413.8 1962.53,1318.8 1962.53,949.84 2067.58,844.8 2067.58,282.43 J10.30@2100,250
P8_0: J11.18 J16.9 R61.2 U3.K1 | length 4545.8
  Top Layer w3: U3.K1@2485.89,1535.17 2487.33,1536.6 2487.33,1544.64 2489.83,1547.14 2489.83,1563.57 2442.2,1611.2 2442.2,1680.3 2455.7,1693.8 v2(2490.58,1693.8) ; v2(3147.58,2066.8) 3990.58,2066.8 4028.58,2104.8 4028.58,2204.43 3978.21,2254.8 J11.18@3977.58,2254.8
  Layer 5 w3: v2(2490.58,1693.8) 2492.42,1693.8 2498.93,1700.3 2630.25,1700.3 2631.25,1699.3 2674.09,1699.3 2675.08,1700.29 v2@3140.08,1700.29 ; v2@3309.58,211.8 3471.58,211.8 3486.58,196.8 v2(3646.58,196.8)
  Layer 4 w3: v2(3646.58,196.8) 3646.58,417.8 3675.64,446.86 3679.52,446.86 v2@3679.58,446.8
  Layer 6 w3: v2@3140.53,1703.32 3140.53,2059.75 v2(3147.58,2066.8) ; v2(3141.53,1700.8) 3194.53,1647.8 3194.53,1276.8 3205.53,1265.8 ; 3205.58,1265.8 3205.58,313.8 v2(3308.58,210.8)
  Bottom Layer w3: v2(3646.58,196.8) 3656.43,206.65 J16.9@3656.43,231 ; R61.2@3652.58,460.11 3669.87,460.11 3679.19,450.8 v2@3679.58,450.8
  other v2: 3678.58,449.8
P8_1: J11.20 R59.2 U3.H4 U18.4 | length 4528.2
  Top Layer w3: v4(2512.58,1496.48) 2513.77,1496.48 2519.89,1490.36 2522.01,1490.36 2525.26,1487.11 U3.H4@2525.26,1476.11 ; U18.4@3676.75,1191.4 3676.75,1243.97 R59.2@3680.05,1247.27 ; R59.2@3680.32,1247 3680.32,1307.54 v2(3680.58,1307.8) ; J11.20@4074.79,2258.21 J11.20@4076,2257
  Layer 5 w3: v2(2356.58,1539.8) 2385.58,1539.8 2418.58,1506.8 2451.58,1506.8 2473.58,1528.8 2494.77,1528.8 2496.53,1527.04 2496.53,1519.87 2496.08,1519.42 2496.08,1511.55 2501.64,1505.98 2503.39,1505.98 2512.58,1496.8 v4(2512.58,1496.48) ; v2(3680.58,1307.8) 3691.58,1318.8 4161.58,1318.8 v2(4173.58,1306.8) ; J11.20@4069.58,2256.8 J11.20@4069.58,2263.43
  Layer 4 w3: v2(2357.53,2246.8) 2381.53,2270.8 2568.5,2270.8 2608.2,2231.1 2693.8,2231.1 2733.5,2270.8 2886.53,2270.8 2909.53,2247.8 3096.53,2247.8 3135.53,2208.8 4027.8,2208.8 4064.53,2245.53 J11.20@4064.53,2253.8 ; J11.20@4082.58,2262.8 4082.58,2250.43 4119.58,2213.43 4119.58,2126.8 4138.58,2107.8 4238.53,2107.8 4267.53,2078.8 4267.53,1756.8 4240.53,1729.8 4219.53,1729.8 4193.58,1703.84 4193.58,1564.8 4173.58,1544.8 v2(4173.58,1306.8)
  Layer 6 w3: v2(2356.58,1539.8) 2356.58,1693.52 2331.5,1718.6 2331.5,1850.26 2357.53,1876.29 v2(2357.53,2246.8)
P8_2: J11.23 U3.L1 U21.9 | length 2802.4
  Top Layer w3: v2(2455.53,1560.8) 2457.97,1560.8 2462.14,1556.62 2464.09,1556.62 2466.21,1554.5 U3.L1@2466.21,1535.17 ; v2@4267.58,1409.8 v2(4268.58,1408.8) 4269.03,1408.34 4314.39,1408.34 U21.9@4314.85,1407.89
  Layer 5 w3: v2(2455.53,1560.8) 2474.58,1560.8 2545.26,1631.48 3195.21,1631.48 3216.53,1652.8 3621.53,1652.8 3648.53,1625.8 3793.58,1625.8 3809.58,1609.8 3844.58,1609.8 3884.58,1569.8 4089.58,1569.8 4250.58,1408.8 v2(4268.58,1408.8)
  Layer 6 w3: v2(4268.58,1408.8) 4290.58,1430.8 4290.58,1713.8 4307.58,1730.8 4307.58,1878.8 4276,1910.37 4276,2141.37 J11.23@4270.58,2146.8
P8_3: J11.25 U3.M3 U21.8 | length 3064.9
  Top Layer w3: U21.8@4314.85,1433.48 4364.26,1433.48 4397.58,1466.8 4397.58,1634.8 4360.58,1671.8 v2@4327.58,1671.8
  Layer 3 w3: v2(2383.58,1667.8) 2423.58,1667.8 2440.58,1650.8 2504.58,1650.8 2519.58,1665.8 3154.58,1665.8 3180.58,1639.8 3870.58,1639.8 3902.58,1671.8 v2(4325.58,1671.8)
  Layer 4 w3: v2(2383.58,1667.8) 2383.58,1529.75 2388.53,1524.8 2436.27,1524.8 2446.53,1514.54 v4(2446.53,1495.8)
  Layer 6 w3: v2(4325.58,1671.8) 4325.58,1823.51 4341.58,1839.51 4341.58,2122.58 4373.8,2154.8 J11.25@4380.58,2154.8
P8_4: J10.33 U3.G6 U21.3 | length 4178.8
  Top Layer w3: v2(4269.58,1558.8) 4270.9,1560.12 4313.53,1560.12 U21.3@4314.85,1561.44
  Layer 3 w3: J10.33@2300,150 2350.58,200.58 2350.58,285.8 2426.58,361.8 2426.58,433.8 2551.58,558.8 2551.58,1324.8 2557.58,1330.8 2564.58,1330.8 2580.58,1346.8 2580.58,1428.8 2572.63,1436.74 v4(2544.95,1436.74)
  Bottom Layer w3: v4(2544.95,1436.74) 2570.58,1436.74 2573.52,1433.8 2600.58,1433.8 2613.08,1446.3 2638.65,1446.3 2642.15,1442.8 2674.2,1442.8 2681.7,1435.3 2692.3,1435.3 2728.8,1398.8 2775.4,1398.8 2827.2,1450.6 2849,1450.6 ; 2849,1450.8 3190.53,1450.8 3201.53,1439.8 3576.03,1439.8 3604.53,1468.3 3778.08,1468.3 3782.58,1463.8 3782.58,1390.8 ; 3782.56,1390.77 3784.53,1388.8 3794.53,1388.8 3796.53,1390.8 ; 3796.58,1390.8 3796.58,1464.8 3800.58,1468.8 3813.58,1468.8 3817.58,1464.8 3817.58,1344.42 3819,1343 ; 3819.19,1343.19 3822.58,1339.8 3831.58,1339.8 3835.58,1343.8 ; 3835,1343 3835.58,1343.58 3835.58,1464.8 3839.58,1468.8 3851.58,1468.8 3854.58,1465.8 3854.58,1365.8 3859.58,1360.8 3866.58,1360.8 3872.53,1366.75 3872.53,1487.75 3876.58,1491.8 3889.58,1491.8 3893.58,1487.8 3893.58,1361.55 3895.34,1359.8 3903.58,1359.8 3906.58,1362.8 3906.58,1465.8 3909.58,1468.8 4187.58,1468.8 4227.72,1508.94 4227.72,1516.94 v2(4269.58,1558.8)
P8_5: J10.35 U3.M1 U21.1 | length 4150.8
  Top Layer w3: J10.35@2400,150 2449.58,199.58 2449.58,260.8 2458.58,269.8 v2(2458.58,488.8) ; v4(2443.14,1531.36) 2446.52,1534.74 2446.52,1545.58 2437.2,1554.9 2437.2,1574.1 2427.7,1583.6 2427.7,1691.7 2437.2,1701.2 2437.2,1804.02 2450.58,1817.4 v2(2450.58,1835.8) ; v2(4281.58,1781.8) 4281.58,1683.8 4314.85,1650.53 U21.1@4314.85,1612.62
  Layer 3 w3: v4(2443.14,1531.36) 2445.04,1531.36 2450.62,1525.78 2455.6,1525.78 2459.58,1521.8 2459.58,1293.8 2425.58,1259.8 2425.58,1098.8 2459.58,1064.8 2459.58,489.8 v2(2458.58,488.8) ; v2(2890.08,1967.8) 2942.08,2019.8 3866.53,2019.8 3938.53,1947.8 3938.53,1805.8 3962.53,1781.8 4245.53,1781.8 4247.53,1783.8 4247.53,1805.04 4249.29,1806.8 4253.77,1806.8 4255.53,1805.04 4255.53,1784.8 4258.53,1781.8 v2(4281.58,1781.8)
  Bottom Layer w3: v2(2450.58,1835.8) 2477.8,1835.8 2503.9,1809.7 2807.3,1809.7 2825.32,1827.72 2825.32,1849.58 2890.08,1914.34 v2(2890.08,1967.8)
P8_6: J10.37 U3.M2 U21.4 | length 4150.9
  Top Layer w3: U3.M2@2446.52,1515.48 2456.27,1525.23 2470.06,1525.23 2476.14,1531.31 2476.14,1539.21 2477.81,1540.88 2477.81,1549.71 v2@2476.14,1551.38 ; v2(2468.58,1820.8) 2468.58,1819.8 2443.8,1795.02 2443.8,1694.2 2435.1,1685.5 2435.1,1606.83 2477.53,1564.4 2477.53,1552.76 v2@2476.14,1551.38 ; v2(2479.22,1551.38) v2@2476.14,1551.38 ; J10.37@2500,150 2549.58,199.58 2549.58,317.8 2504.58,362.8 v2(2504.58,540.8) ; v2(4248.58,1763.8) 4247.58,1762.8 4247.58,1538.94 4250.67,1535.84 U21.4@4314.85,1535.84
  Layer 3 w3: v2(2479.22,1551.38) 2479.22,1548.94 2483.08,1545.08 2483.08,1537.3 2466.58,1520.8 2466.58,1291.8 2431.58,1256.8 2431.58,1101.28 2466.58,1066.28 2466.58,835.8 2489.58,812.8 2489.58,555.8 v2(2504.58,540.8) ; v2(2836.53,1826.8) 2930.53,1732.8 3492.01,1732.8 3496.01,1728.8 3724.53,1728.8 3730.53,1734.8 3730.53,1791.53 3731,1792 ; 3730.53,1791.8 3733.53,1794.8 3743.53,1794.8 3748.53,1789.8 ; 3748,1790 3748.53,1789.47 3748.53,1732.8 3752.53,1728.8 4055.05,1728.8 4069.55,1743.3 4135.93,1743.3 4150.43,1728.8 4174.58,1728.8 4178.58,1732.8 4178.58,1758.8 4183.58,1763.8 v2(4248.58,1763.8)
  Bottom Layer w3: v2(2468.58,1820.8) 2485.68,1803.7 2813.43,1803.7 v2(2836.53,1826.8)
P8_7: J10.39 U3.N1 U21.5 | length 4140.2
  Top Layer w3: U3.N1@2426.84,1535.17 2409.97,1535.17 2406.84,1538.3 v2(2404.4,1538.3) 2420.58,1554.48 2420.58,1696.55 2429.53,1705.5 v2(2429.53,1827.8) ; v2(4224.58,1700.8) 4224.58,1523.8 4238.12,1510.25 U21.5@4314.85,1510.25
  Layer 3 w3: v2(2404.4,1538.3) 2404.4,1498.58 2428.32,1474.66 2428.32,1338.54 2409.58,1319.8 2409.58,805.8 2400.58,796.8 2400.58,543.8 2429.58,514.8 v2(2429.58,469.8) ; v2(2429.53,1827.8) 2429.53,1779.84 2509.08,1700.3 2630.25,1700.3 2632.75,1697.8 2705.8,1697.8 2710.8,1692.8 3010.58,1692.8 3025.58,1677.8 3878.53,1677.8 3900.53,1699.8 4223.58,1699.8 v2(4224.58,1700.8)
  Layer 4 w3: v2(2429.58,469.8) 2536.66,469.8 2537.66,468.8 v2(2640.58,468.8)
  Bottom Layer w3: J10.39@2600,150 2640.58,190.58 v2(2640.58,468.8)
P15_0: J11.28 R62.1 R64.1 U3.N5 | length 5479.6
  Top Layer w3: v2(2347.58,1494.8) 2388.47,1494.8 U3.N5@2426.84,1456.43 ; v2(4310.58,395.8) 4311.69,396.91 R62.1@4311.69,432 ; R64.1@4488.32,411 4488.32,390.06 v2(4521.58,356.8) v2@4522.58,355.8
  Layer 5 w3: v2(2441.58,364.8) 2869.53,364.8 2917.53,316.8 3285.53,316.8 3343.53,374.8 3976.07,374.8 3980.57,379.3 4295.08,379.3 v2@4311.08,395.3 ; v2(4310.58,395.8) 4482.58,395.8 v2(4521.58,356.8)
  Layer 6 w3: v2(2347.58,1494.8) 2345.86,1493.07 2345.86,1486.07 2341.58,1481.8 2341.58,1407.8 2353.58,1395.8 2353.58,1276.8 2372.58,1257.8 2372.58,630.8 2374.58,628.8 2374.58,556.8 2395.58,535.8 2395.58,443.8 2441.58,397.8 v2(2441.58,364.8) ; J11.28@4475.58,2255.8 4477.21,2255.8 4526.58,2206.43 4526.58,2134.8 4552.58,2108.8 4552.58,1908.8 4537.58,1893.8 4537.58,1329.8 4550.58,1316.8 4550.58,1000.8 4521.58,971.8 v2(4521.58,356.8)
P15_1: J11.30 U3.K6 U6.A4 U7.A4 | length 3812.2
  Top Layer w3: v2(2447.58,999.8) 2828.53,999.8 2933.53,1104.8 3019.53,1104.8 3037.53,1086.8 3108.58,1086.8 v2(3122.58,1072.8) ; U3.K6@2485.89,1436.74 2498.2,1436.74 2503.14,1431.8 v4(2505.58,1431.8)
  Layer 5 w3: v2(3122.58,1072.8) 3123.08,1073.3 3355.08,1073.3 v2(3368.58,1059.8) ; v2(3620.53,2117.8) 3620.53,2152.04 3617.58,2154.99 3617.58,2186.8 3640.58,2209.8 4528.8,2209.8 J11.30@4576,2257 4578.58,2259.58 J11.30@4578.58,2259.8
  Layer 4 w3: v2(3368.58,1059.8) 3368.58,1191.8 3475.53,1298.75 3475.53,1433.84 v2(3452.74,1456.63)
  Layer 6 w3: v2(2447.58,999.8) 2462.58,1014.8 2462.58,1088.8 2427.58,1123.8 2427.58,1262.8 2462.58,1297.8 2462.58,1416.8 2477.58,1431.8 v4(2505.58,1431.8) ; v3@3452.53,1824.69 v3(3452.72,1824.51) 3471.53,1805.69 3471.53,1637.8 3460.53,1626.8 3460.53,1569.8 3460.53,1555.8 3452.74,1548.01 3452.74,1474.8 v2(3452.74,1456.63) ; v3@3452.53,1826.8 3452.53,2033.53 3536.8,2117.8 v2(3620.53,2117.8)
PA_OUT_L: C57.1 FB11.1 U9.13 | length 214.5
  Top Layer w5: U9.13@1246.74,1603.88 1288.5,1603.88 v2(1296.58,1595.8) ; v2@1289.58,1683.8 v2(1290.58,1683.8) 1292.47,1683.8 1299.47,1676.8 FB11.1@1319.85,1676.8
  Layer 4 w5: v2(1290.58,1683.8) 1307.58,1666.8 1307.58,1606.8 v2(1296.58,1595.8)
  Bottom Layer w5: C57.1@1262.72,1683 1263.52,1683.8 1289.58,1683.8 v2@1290.58,1682.8
PA_OUT_R: C56.1 FB10.1 U9.15 | length 194.4
  Top Layer w5: U9.15@1246.74,1635.37 1328,1635.37 v2(1331.58,1631.8) ; FB10.1@1320.85,1598.8 1320.85,1618.06 v2@1335.58,1632.8
  Bottom Layer w5: C56.1@1264.46,1635.37 1268.04,1631.8 1329.58,1631.8 v2@1330.58,1632.8
PMU_AMUX: TP22.1 U3.K12 | length 371
  Layer 6 w3: v4(2485.89,1318.63) 2519.26,1285.26 2519.26,1184.48 2474.58,1139.8 2474.58,1042.8 v2(2496.58,1020.8)
  Bottom Layer w3: v2@2495.58,1020.8 2495.58,1033.58 TP22.1@2509,1047
PMU_AMUX_J: TP56.1 U22.M18 | length 469.3
  Layer 5 w5: v2(759.58,659.8) 780.58,638.8 924.53,638.8 1017.53,545.8 1133.53,545.8 1142.35,554.62 v3(1142.35,590.24)
POR_N: J11.7 R16.1 R30.1 SW2.1 U3.J10 U22.L5 | length 5277
  Top Layer w5: SW2.1@2885.58,205.8 2949.53,205.8 2976.53,232.8 2976.53,372.8 2978.53,370.8 3036.53,370.8 3046.53,360.8 R30.1@3071.85,360.8
  Layer 5 w5: v2(1143.53,1025.8) 1157.53,1039.8 1283.53,1039.8 1394.03,1150.3 1574.3,1150.3 1589.8,1165.8 1750.53,1165.8 1794.53,1209.8 2199.58,1209.8 2295.58,1113.8 2395.58,1113.8 2412.58,1096.8 2529.58,1096.8 2551.58,1118.8 2739.58,1118.8 2769.58,1118.8 v2(2779.58,1128.8) ; v2(2901.53,2070.8) 2902.53,2071.8 3115.53,2071.8 3132.53,2088.8 3407.8,2088.8 J11.7@3476,2157 3480.8,2161.8 J11.7@3485.58,2161.8
  Layer 4 w5: v2(1143.53,1025.8) 1143.53,884.8 1162.04,866.29 v3(1162.04,846.15)
  Layer 6 w5: SW2.1@2889.63,205.89 2889.63,841.75 2825.58,905.8 2825.58,1010.8 2779.58,1056.8 v2(2779.58,1128.8) 2780,1129.22 2780,1690.22 2874.58,1784.8 2874.58,1923.8 2901.58,1950.8 2901.58,2070.75 v2(2901.53,2070.8)
  Bottom Layer w5: 2545.58,1340.11 2545.58,1313.75 2589.53,1269.8 2589.53,1253.58 2609.53,1233.58 2609.53,1207.8 2625.53,1191.8 2703.53,1191.8 2739.58,1155.74 2739.58,1122.74 v2@2740.53,1121.8 ; v2@2779.53,1130.8 v2@2779.58,1130.84
  Bottom Layer w8: v4(2505.58,1357.8) 2523.26,1340.11 2545.58,1340.11
  other v2: 2739.58,1119.82
POR_N_J: R92.1 SW5.1 U22.U18 U23.1 | length 1639.4
  Top Layer w5: U23.1@515.23,352.8 656.53,352.8 v1@742.53,438.8
  Layer 5 w5: v3(1043.93,590.24) 1071.98,590.24 1086.53,604.8 1302.53,604.8 1331.53,575.8 1363.53,575.8 1387.53,599.8 1501.53,599.8 1550.53,550.8 1656.53,550.8 1720.53,614.8 SW5.1@1722.53,614.8
  Layer 4 w5: v1@743.53,438.8 743.53,466.8 772.53,495.8 1007.53,495.8 1044.46,532.73 1044.46,589.71 v3(1043.93,590.24) 1084.2,590.24 1107.53,613.57 v3(1107.53,729.43)
  Bottom Layer w5: v3(1107.53,729.43) R92.1@1127.53,729.43
  other v1: 742.57,438.31
PWR_V_SUM: D4.1 D5.1 SW1.1 | length 346.8
  Bottom Layer w15: D4.1@472.58,1084.8 D4.1@478.08,1079.3 ; D4.1@475.58,1076.8 481,1071.37 D4.1@481,1064 ; D5.1@560.53,996.8 502.53,996.8 481,1018.32 D4.1@481,1064 ; SW1.1@643.58,1129.8 578.58,1064.8 481.8,1064.8 D4.1@481,1064
SD_3V3: C50.2 C53.2 J6.4 R50.1 U11.6 | length 692
  Top Layer w15: v4(5064.53,1486.8) 5065.75,1485.58 J6.4@5145.57,1485.58
  Layer 3 w15: v4(4795.1,1505.54) 4795.1,1490.23 4841.53,1443.8 5021.53,1443.8 v4(5064.53,1486.8)
  Bottom Layer w15: U11.6@4577.59,1472.25 4578.09,1472.75 4578.09,1531.67 R50.1@4579.22,1532.8 4748.58,1532.8 4775.58,1505.8 v4@4795.53,1505.8
SD_CLK_V: J6.5 U8.D3 | length 415.3
  Top Layer w3: v2(4883.26,1523.25) 4883.26,1507.51 4948.49,1442.27 4982.58,1442.27 ; 4982.58,1441.8 4983.05,1442.27 5069.58,1442.27 ; 5069.58,1441.8 5071.58,1439.8 5071.58,1386.8 5074.58,1383.8 5080.58,1383.8 5083.58,1386.8 5083.58,1439.27 5086.58,1442.27 J6.5@5145.57,1442.27
SD_CMD_V: J6.3 U8.C4 | length 415.2
  Top Layer w3: v2(5110.58,1526.8) 5143.48,1526.8 J6.3@5145.57,1528.88
  Layer 4 w3: v2(4839.58,1530.8) 4865.58,1556.8 4865.58,1563.04 4872.34,1569.8 4967.58,1569.8 5010.58,1526.8 5071.58,1526.8 5073.58,1528.8 5073.58,1547.04 5075.34,1548.8 5081.82,1548.8 5083.58,1547.04 5083.58,1529.8 5086.58,1526.8 5109.58,1526.8 v2@5110.58,1525.8
  Bottom Layer w3: v2(4839.58,1530.8) 4847.78,1539 U8.C4@4867.51,1539
SD_D0_V: J6.7 U8.D4 | length 415.7
  Top Layer w3: v2(4836.58,1507.8) 4988.58,1355.8 5015.58,1355.8 ; 5015.58,1355.66 5067.58,1355.66 ; 5067.58,1355.8 5069.58,1357.8 5069.58,1358.8 5072.58,1361.8 5077.58,1361.8 5080.58,1358.8 5080.58,1357.41 5082.34,1355.66 J6.7@5145.57,1355.66
  Bottom Layer w3: v2(4836.58,1507.8) 4852.05,1507.8 U8.D4@4867.51,1523.25
SD_D1_V: J6.8 U8.E4 | length 415.9
  Top Layer w3: v2(4838.58,1481.8) 5006.06,1314.32 J6.8@5145.57,1314.32
  Bottom Layer w3: v2(4838.58,1481.8) 4841.8,1481.8 U8.E4@4867.51,1507.51
SD_D2_V: J6.1 U8.A4 | length 417.1
  Top Layer w3: v2@4835.58,1600.8 v2(4836.58,1599.8) 4868.8,1599.8 4870.8,1597.8 4900.58,1597.8 4918.28,1615.5 5067.58,1615.5 ; 5067.58,1615.8 5069.58,1617.8 5069.58,1638.75 5069.53,1638.8 ; 5069.58,1638.8 5072.58,1641.8 5079.58,1641.8 5082.56,1638.82 5082.58,1638.75 5082.58,1618.5 5085.58,1615.5 J6.1@5145.57,1615.5
  Bottom Layer w3: v2(4836.58,1599.8) 4854.58,1599.8 4867.51,1586.87 U8.A4@4867.51,1570.5
SD_D3_V: J6.2 U8.B4 | length 415.5
  Top Layer w3: v2(5114.41,1572.19) J6.2@5145.57,1572.19
  Layer 3 w3: v2@4840.58,1548.8 4855.58,1548.8 4873.36,1566.58 5062.58,1566.58 ; 5062.58,1566.8 5065.58,1569.8 5065.58,1598.8 5067.58,1600.8 5077.58,1600.8 5079.58,1598.8 5079.58,1589.8 5080.58,1588.8 5083.58,1588.8 5085.58,1586.8 5085.58,1580.55 5083.82,1578.8 5081.58,1578.8 5079.58,1576.8 5079.58,1569.58 5082.58,1566.58 5108.8,1566.58 v2(5114.41,1572.19)
  Bottom Layer w3: v2(4839.58,1548.8) 4842.01,1548.8 4847.97,1554.75 U8.B4@4867.51,1554.75
SEU_RXD: S16.1 SW4.5 | length 1885.7
  Top Layer w10: SW4.5@1796.53,2194.8 1867.53,2194.8 v4(1890.53,2171.8)
  Layer 4 w10: v4(1890.53,2171.8) 1890.53,1460.8 1840.53,1410.8 1840.53,1328.8 1974.53,1194.8 1974.53,1110.8 1996.53,1088.8 1996.53,950.8 2097.53,849.8 2104.53,849.8 2144.53,809.8 v4(2144.53,587.8)
  Bottom Layer w5: S16.1@2118,564.3 2140.2,564.3 2144.53,568.63 v4(2144.53,587.8)
SEU_TXD: S17.1 SW4.1 | length 1940.7
  Top Layer w5: SW4.1@1686.53,2194.8 1689.53,2191.8 1720.53,2191.8 1761.53,2150.8 v4(1855.53,2150.8)
  Layer 4 w5: v4(1855.53,2150.8) 1856.53,2150.8 1870.53,2136.8 1870.53,1713.01 1819.08,1661.56 1819.08,1491.41 1819.53,1490.95 1819.53,1320.8 1958.53,1181.8 1958.53,1081.8 1975.53,1064.8 1975.53,952.8 2064.03,864.3 2064.03,579.3 2053.53,568.8 v4@2053.53,565.8
  Bottom Layer w5: S17.1@2019,565.3 2041.2,565.3 2042.74,566.84 2051.58,566.84 v4(2052.53,567.8)
SEUART_RX_J: J23.3 U22.A14 | length 361
  Layer 6 w5: v3(1358.89,668.98) 1432.53,595.34 1432.53,514.47 J23.3@1557,390
SEUART_TX_J: J23.2 U22.A13 | length 363.9
  Layer 6 w5: v3(1358.89,688.67) 1348.4,688.67 1339.2,679.47 1339.2,668.98 1357.55,650.64 1361.24,650.64 1420.53,591.34 1420.53,499.8 1457,463.32 J23.2@1457,390
T_INT: J17.6 R63.2 | length 118.4
  Top Layer w5: R63.2@4272.32,482 4273.58,483.26 4273.58,499.8 4286.58,512.8 v2(4289.58,512.8)
  Bottom Layer w5: v2@4290.58,512.8 4313.58,512.8 4325.43,500.95 J17.6@4325.43,462
T_RSTn: J17.7 R62.2 | length 152.4
  Top Layer w5: R62.2@4272.32,432 4272.32,399.06 v2(4272.58,398.8)
  Bottom Layer w5: v2@4270.58,399.8 4271.58,398.8 v2(4272.58,398.8) 4291.58,398.8 4309.58,416.8 4330.58,416.8 4345.11,431.33 J17.7@4345.11,462
TCK_J: J22.9 U22.B17 | length 898.8
  Bottom Layer w5: v3(1339.2,609.93) 1337.31,609.93 1329.98,617.26 1326.07,617.26 1321.53,621.8 1321.53,638.8 1332.03,649.3 1395.03,649.3 1403.22,657.48 1444.22,657.48 1475.53,688.8 1541.53,688.8 1568.82,716.09 1629.82,716.09 1629.86,716.05 1858.78,716.05 1864.53,721.8 1864.53,758.8 1860.53,762.8 1797.53,762.8 1765.53,794.8 1765.53,849.88 1778.53,862.88 1778.53,875.42 1804.9,901.8 J22.9@1812.53,901.8
TDI_J: J22.5 U22.A18 | length 741.3
  Layer 4 w5: v2(1358.89,590.24) 1435.29,590.24 1610.53,765.49 v1(1610.53,991.8)
  Bottom Layer w5: v1(1610.53,991.8) 1638.53,1019.8 1677.03,1019.8 1738.28,958.55 1756.46,958.55 J22.5@1762,953
TDO_J: J22.11 U22.B16 | length 853
  Layer 6 w5: v2(1831.53,680.8) 1831.53,706 1829.79,707.74 1829.79,731.05 v2(1842.53,743.8)
  Bottom Layer w5: v3(1339.2,629.61) 1339.39,629.8 1439.53,629.8 1485.53,675.8 1560.53,675.8 1564.53,679.8 1677.53,679.8 1695.53,697.8 1812.53,697.8 1828.19,682.14 1828.3,682.14 1830.53,679.9 v2@1830.53,679.8 ; J22.11@1712,900.32 1712,795.32 1763.53,743.8 v2(1842.53,743.8)
TEST_M: R29.2 TP24.1 U3.H7 | length 573.1
  Top Layer w3: v4@2513.58,1413.8 2515.71,1415.93 2524.13,1415.93 U3.H7@2525.26,1417.06 ; v2@2727.58,1291.8 v2(2729.58,1291.8) 2754.58,1316.8 R29.2@2847.89,1316.8
  Layer 4 w3: v4(2513.58,1414.8) 2514.58,1414.8 2521.5,1407.87 2536.94,1407.87 2557.94,1386.87 2571.94,1386.87 2602.12,1417.06 2611.99,1417.06 2621.23,1426.3 2625.51,1426.3 2625.77,1426.56 2666.64,1426.56 2683.88,1443.8 2730.58,1443.8 v2(2749.58,1424.8)
  Layer 6 w3: v2(2729.58,1291.8) 2729.58,1293.8 2760.58,1324.8 2760.58,1361.8 2749.58,1372.8 v2(2749.58,1424.8)
TEST_M_J: R91.2 TP57.1 U22.J11 | length 376.8
  Layer 4 w5: v2(1115.53,874.8) 1115.53,767.8 1155.29,728.04 v3(1201.41,728.04)
  Bottom Layer w5: v2(1115.53,874.8) 1115.77,875.03 1115.77,984.03 1119.53,987.8 1140.53,987.8 1147.22,981.11 R91.2@1169.53,981.11
TMS_J: J22.7 U22.A19 | length 1138.9
  Top Layer w5: U22.A19@1358.89,570.56 1377.29,570.56 1479.53,672.8 1515.53,672.8 1522.53,665.8 1616.53,665.8 1643.53,692.8 v2(2032.53,692.8)
  Bottom Layer w5: J22.7@1862,953 1884.21,930.8 1968.53,930.8 2067.08,832.25 2067.08,727.34 v2(2032.53,692.8)
USB_CYP_N: R8.1 U19.15 | length 3575.5
  Top Layer w6: R8.1@490.69,663 490.69,639.64 497.53,632.8 516.26,632.8 527.53,621.52 527.53,521.8 552.53,496.8 589.08,496.8 602.58,510.3 v1(602.58,510.8) ; v2(2267.58,877.8) 2280.53,890.8 2370.71,890.8 2400.71,860.8 2400.71,843.64 2395.37,838.3 U19.15@2395.37,825.3
  Layer 3 w3.5: v1@596.53,506.8 602.11,506.8 605.74,503.17 605.74,497.35 607.79,495.3 630.53,495.3 632.58,497.35 632.58,515.75 632.53,515.8 ; v1(602.58,510.8) v1@604.45,508.93 ; 632.58,516.04 634.34,517.8 639.82,517.8 641.58,516.04 ; 641.53,515.8 641.58,515.75 641.58,498.8 645.08,495.3 922.27,495.3 947.27,470.3 1252.66,470.3 1258.52,464.44 1258.52,381.81 1265.53,374.8 1275.53,374.8 1281.03,380.3 1281.03,458.49 1292.84,470.3 1662.03,470.3 1665.84,466.49 1674.03,458.3 1674.03,366.3 1677.53,362.8 1693.53,362.8 1697.53,366.8 1697.53,463.7 1704.63,470.8 1809.43,470.8 1819.53,460.7 1819.53,366.8 1824.53,361.8 1834.53,361.8 1843.53,370.8 1843.53,460.7 1853.63,470.8 2265.43,470.8 2273.53,462.7 2273.53,330.8 2279.53,324.8 2290.53,324.8 2295.53,329.8 2295.53,429.8 ; v2@2266.53,876.8 2267.08,877.34 2267.08,888.04 2268.84,889.8 2275.98,889.8 2276.98,890.8 2316.58,890.8 2334.58,872.8 2334.58,479.74 2325.63,470.8 2305.63,470.8 2295.53,460.7 2295.53,430.8